# EAGLE board gator-bit-Panel (EAGLE 7.7.0), part 1 of 3
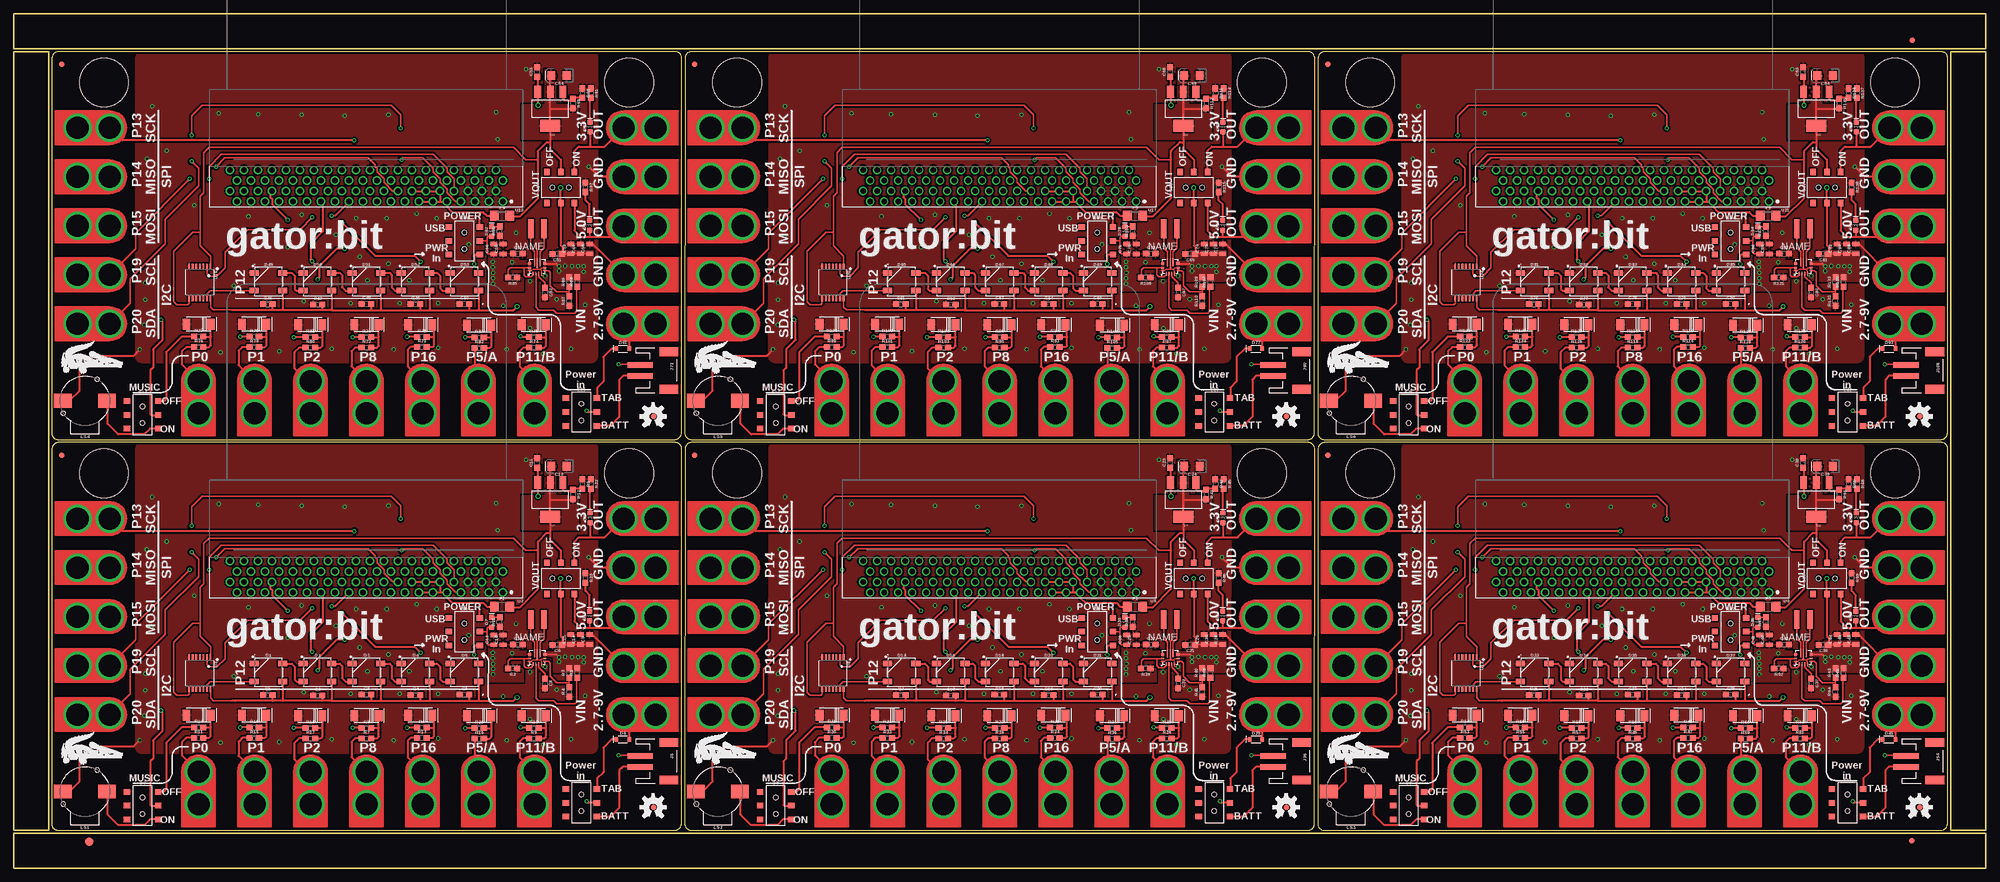
[diagram p0: board, top side]
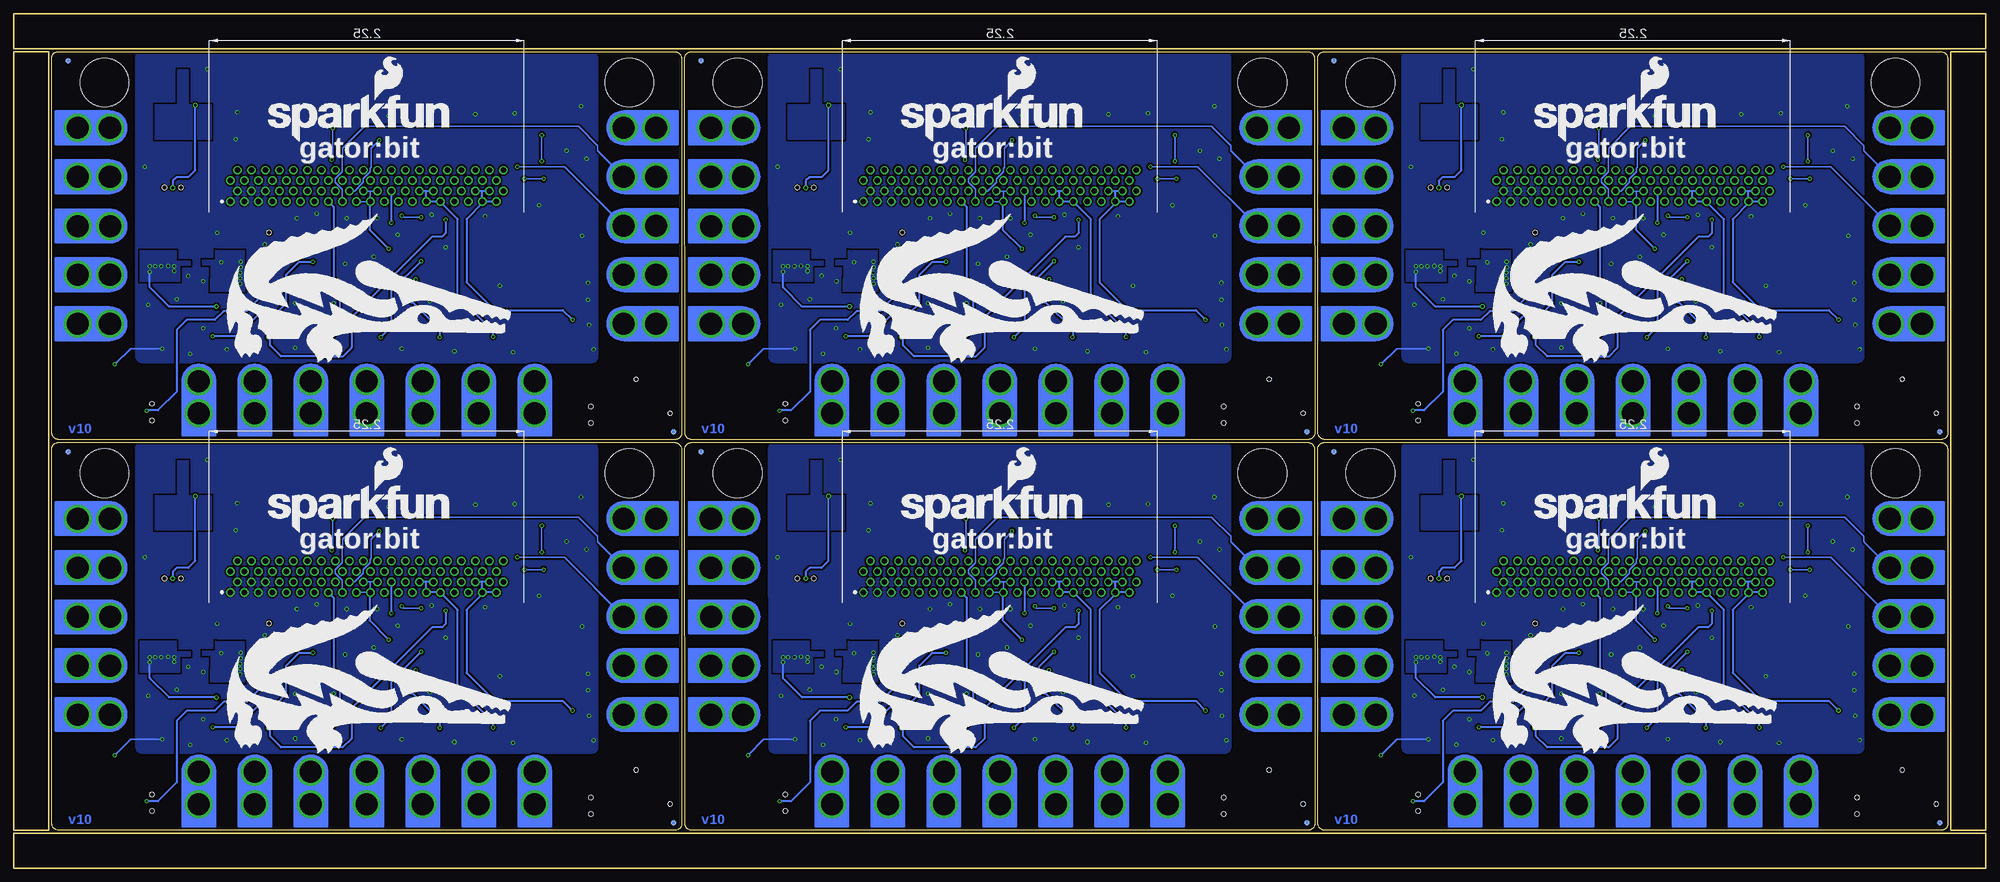
[diagram p1: board, bottom side, seen from below]

Size 357.82 x 155 mm. Coordinates in mm from the lower left corner, seen from the top.
Outline: 6.92,75.98 6.86,8.13 arc90 8.13,6.86 119.89,6.86 arc90 121.16,8.13 121.22,75.98 arc90 119.95,77.25 8.19,77.25 arc90 6.92,75.98
Outline: 121.79,75.98 121.73,8.13 arc90 123,6.86 234.76,6.86 arc90 236.03,8.13 236.09,75.98 arc90 234.82,77.25 123.06,77.25 arc90 121.79,75.98
Outline: 236.66,75.98 236.6,8.13 arc90 237.87,6.86 349.63,6.86 arc90 350.9,8.13 350.96,75.98 arc90 349.69,77.25 237.93,77.25 arc90 236.66,75.98
Outline: 6.92,146.88 6.86,79.03 arc90 8.13,77.76 119.89,77.76 arc90 121.16,79.03 121.22,146.88 arc90 119.95,148.15 8.19,148.15 arc90 6.92,146.88
Outline: 121.79,146.88 121.73,79.03 arc90 123,77.76 234.76,77.76 arc90 236.03,79.03 236.09,146.88 arc90 234.82,148.15 123.06,148.15 arc90 121.79,146.88
Outline: 236.66,146.88 236.6,79.03 arc90 237.87,77.76 349.63,77.76 arc90 350.9,79.03 350.96,146.88 arc90 349.69,148.15 237.93,148.15 arc90 236.66,146.88
Outline: 0,6.35 357.82,6.35 357.82,0 0,0 0,6.35
Outline: 351.47,148.15 357.82,148.15 357.82,6.86 351.47,6.86 351.47,148.15
Outline: 0,155 357.82,155 357.82,148.65 0,148.65 0,155
Outline: 0,148.15 6.35,148.15 6.35,6.86 0,6.86 0,148.15
Copper layers (1*16): Top 0.035mm / dielectric 1.5mm / Bottom 0.035mm
Design rules "SparkFun-2-layer-PCBWay-LIMIT": minimum track width 6mil, minimum drill 0.3mm, track to track 6mil, track to pad 6mil, pad to pad 6mil, via to via 6mil, smd to smd 6mil, copper to edge 6mil, drill to drill 6mil, minimum pad ring 7mil, minimum via ring 7mil, stop-mask expansion 4mil, vias tented up to drill 25mil, thermal gap 10mil
Holes 8.89 mm at 16.38,71.63 111.63,71.63 131.25,71.63 226.5,71.63 246.13,71.63 341.38,71.63 16.38,142.53 111.63,142.53 131.25,142.53 226.5,142.53 246.13,142.53 341.38,142.53

## Footprints (pad centres in the part's own frame; a part is rotated, then mirrored left to right if it is on the bottom)
0603 = smd 1.1 x 1: 1 -0.85,0; 2 0.85,0
0805 = smd 0.8 x 1.2: 1 -0.9,0; 2 0.9,0
EIA3216 = smd 1.4 x 1.6: + 1.4,0; - -1.4,0
WS2812B = smd 1.651 x 1: 1 2.577,-1.6; 2 2.577,1.6; 3 -2.577,1.6; 4 -2.577,-1.6
SOD-323 = smd 0.63 x 0.83: A 1.15,0; C -1.15,0
LED-0603 = smd 1 x 1: A -0.877,0; C 0.877,0
SOD-128 = smd 2 x 1.4: P$1 0,2.5; P$2 0,-1.9
FIDUCIAL-1X2 = smd 1 x 1: 1 0,0
FIDUCIAL-1.5X3 = smd 1.5 x 1.5: 1 0,0
1206 = smd 1.6 x 1.8: 1 -1.4,0; 2 1.4,0
GATOR = drill 4 pad 5.08: P$1 0,-6.096; P$2 0,-0.254
JST-2-SMD = smd 1 x 4.6: 1 -1,-3.7; 2 1,-3.7 | smd 1.6 x 3.4: NC1 -3.4,1.5; NC2 3.4,1.5
XFL4020 = smd 0.965 x 3.404: P$1 1.194,0; P$2 -1.194,0
BUZZER-CCV = smd 3.2 x 2.5: + 4,0; - -4,0 | hole 0.8: -3.9,-2.25; 2.25,3.9
SWITCH_DPDT_SMD_AYZ0202 = smd 1 x 1.15: 1 -2.5,2.825; 2 0,2.825; 3 2.5,2.825; 4 -2.5,-2.825; 5 0,-2.825; 6 2.5,-2.825 | hole 0.85: 1.5,0; -1.5,0
TPS63070RNM = smd 0.6 x 0.25: P$1 0,2.145; P$2 0,1.645; P$3 0,1.145; P$4 0,0.645 | smd 0.25 x 0.6: P$5 0.5,-0.005; P$6 1,-0.005; P$14 1,2.795; P$15 0.5,2.795 | smd 0.75 x 0.6: P$7 1.757,0.006; P$12 1.768,2.794 | smd 1.45 x 0.35: P$9 1.988,0.895; P$11 1.988,1.895 | smd 1.8 x 0.35: P$10 1.812,1.395
MICRO:BIT_RA_PTH = drill 1: A1 -24.765,7.62; A2 -23.495,5.72; A3 -22.225,7.62; A4 -20.955,5.72; A5 -19.685,7.62; A6 -18.415,5.72; A7 -17.145,7.62; A8 -15.875,5.72; A9 -14.605,7.62; A10 -13.335,5.72; A11 -12.065,7.62; A12 -10.795,5.72; A13 -9.525,7.62; A14 -8.255,5.72; A15 -6.985,7.62; A16 -5.715,5.72; A17 -4.445,7.62; A18 -3.175,5.72; A19 -1.905,7.62; A20 -0.635,5.72; A21 0.635,7.62; A22 1.905,5.72; A23 3.175,7.62; A24 4.445,5.72; A25 5.715,7.62; A26 6.985,5.72; A27 8.255,7.62; A28 9.525,5.72; A29 10.795,7.62; A30 12.065,5.72; A31 13.335,7.62; A32 14.605,5.72; A33 15.875,7.62; A34 17.145,5.72; A35 18.415,7.62; A36 19.685,5.72; A37 20.955,7.62; A38 22.225,5.72; A39 23.495,7.62; A40 24.765,5.72; B1 -24.765,3.82; B2 -23.495,1.92; B3 -22.225,3.82; B4 -20.955,1.92; B5 -19.685,3.82; B6 -18.415,1.92; B7 -17.145,3.82; B8 -15.875,1.92; B9 -14.605,3.82; B10 -13.335,1.92; B11 -12.065,3.82; B12 -10.795,1.92; B13 -9.525,3.82; B14 -8.255,1.92; B15 -6.985,3.82; B16 -5.715,1.92; B17 -4.445,3.82; B18 -3.175,1.92; B19 -1.905,3.82; B20 -0.635,1.92; B21 0.635,3.82; B22 1.905,1.92; B23 3.175,3.82; B24 4.445,1.92; B25 5.715,3.82; B26 6.985,1.92; B27 8.255,3.82; B28 9.525,1.92; B29 10.795,3.82; B30 12.065,1.92; B31 13.335,3.82; B32 14.605,1.92; B33 15.875,3.82; B34 17.145,1.92; B35 18.415,3.82; B36 19.685,1.92; B37 20.955,3.82; B38 22.225,1.92; B39 23.495,3.82; B40 24.765,1.92
TSSOP14 = smd 0.305 x 0.991: 1 -1.95,-2.918; 2 -1.3,-2.918; 3 -0.65,-2.918; 4 0,-2.918; 5 0.65,-2.918; 6 1.3,-2.918; 7 1.95,-2.918; 8 1.95,2.918; 9 1.3,2.918; 10 0.65,2.918; 11 0,2.918; 12 -0.65,2.918; 13 -1.3,2.918; 14 -1.95,2.918
SOT223 = smd 1.219 x 2.235: 1 -2.311,-3.099; 2 0,-3.099; 3 2.311,-3.099 | smd 3.6 x 2.2: 4 0,3.099

## Placement (x,y rotation side)
C1  0.1uF  [0603]  46.08,31.42 0 top
C2  0.1uF  [0603]  55.15,31.35 0 top
C3  0.1uF  [0603]  63.99,31.48 0 top
C4  0.1uF  [0603]  72.9,31.42 0 top
C5  0.1uF  [0603]  81.79,31.48 0 top
C6  10uF  [0603]  98.62,40.51 180 top
C7  0.1uF  [0603]  160.95,31.42 0 top
C8  0.1uF  [0603]  96.39,33.53 270 top
C9  22uF  [0805]  104.51,41.47 90 top
C10  10uF  [0805]  88.8,41.43 90 top
C11  0.1uF  [0603]  94.96,73.53 90 top
C12  10uF  [EIA3216]  98.93,72.9 180 top
C13  10uF  [0805]  87.09,41.43 90 top
C14  10uF  [0603]  91.47,40.58 0 top
C15  22uF  [0805]  101.1,41.47 90 top
C16  22uF  [0805]  102.82,41.47 90 top
C17  0.1uF  [0603]  170.02,31.35 0 top
C18  0.1uF  [0603]  178.86,31.48 0 top
C19  0.1uF  [0603]  187.77,31.42 0 top
C20  0.1uF  [0603]  196.66,31.48 0 top
C21  10uF  [0603]  213.49,40.51 180 top
C22  0.1uF  [0603]  211.26,33.53 270 top
C23  0.1uF  [0603]  209.84,73.53 90 top
C24  10uF  [EIA3216]  213.8,72.9 180 top
C25  10uF  [0805]  203.68,41.43 90 top
C26  10uF  [0805]  201.96,41.43 90 top
C27  10uF  [0603]  206.34,40.58 0 top
C28  22uF  [0805]  219.38,41.47 90 top
C29  22uF  [0805]  215.98,41.47 90 top
C30  22uF  [0805]  217.69,41.47 90 top
C31  0.1uF  [0603]  275.82,31.42 0 top
C32  0.1uF  [0603]  284.89,31.35 0 top
C33  0.1uF  [0603]  293.73,31.48 0 top
C34  0.1uF  [0603]  302.65,31.42 0 top
C35  0.1uF  [0603]  311.54,31.48 0 top
C36  10uF  [0603]  328.36,40.51 180 top
C37  0.1uF  [0603]  326.14,33.53 270 top
C38  0.1uF  [0603]  324.71,73.53 90 top
C39  10uF  [EIA3216]  328.68,72.9 180 top
C40  10uF  [0805]  318.55,41.43 90 top
C41  10uF  [0805]  316.83,41.43 90 top
C42  10uF  [0603]  321.21,40.58 0 top
C43  22uF  [0805]  334.25,41.47 90 top
C44  22uF  [0805]  330.85,41.47 90 top
C45  22uF  [0805]  332.56,41.47 90 top
C46  0.1uF  [0603]  46.08,102.31 0 top
C47  0.1uF  [0603]  55.15,102.25 0 top
C48  0.1uF  [0603]  63.99,102.38 0 top
C49  0.1uF  [0603]  72.9,102.32 0 top
C50  0.1uF  [0603]  81.79,102.38 0 top
C51  10uF  [0603]  98.62,111.41 180 top
C52  0.1uF  [0603]  96.39,104.43 270 top
C53  0.1uF  [0603]  94.96,144.43 90 top
C54  10uF  [EIA3216]  98.93,143.8 180 top
C55  10uF  [0805]  88.8,112.33 90 top
C56  10uF  [0805]  87.09,112.33 90 top
C57  10uF  [0603]  91.47,111.47 0 top
C58  22uF  [0805]  104.51,112.36 90 top
C59  22uF  [0805]  101.1,112.36 90 top
C60  22uF  [0805]  102.82,112.36 90 top
C61  0.1uF  [0603]  160.95,102.31 0 top
C62  0.1uF  [0603]  170.02,102.25 0 top
C63  0.1uF  [0603]  178.86,102.38 0 top
C64  0.1uF  [0603]  187.77,102.32 0 top
C65  0.1uF  [0603]  196.66,102.38 0 top
C66  10uF  [0603]  213.49,111.41 180 top
C67  0.1uF  [0603]  211.26,104.43 270 top
C68  0.1uF  [0603]  209.84,144.43 90 top
C69  10uF  [EIA3216]  213.8,143.8 180 top
C70  10uF  [0805]  203.68,112.33 90 top
C71  10uF  [0805]  201.96,112.33 90 top
C72  10uF  [0603]  206.34,111.47 0 top
C73  22uF  [0805]  219.38,112.36 90 top
C74  22uF  [0805]  215.98,112.36 90 top
C75  22uF  [0805]  217.69,112.36 90 top
C76  0.1uF  [0603]  275.82,102.31 0 top
C77  0.1uF  [0603]  284.89,102.25 0 top
C78  0.1uF  [0603]  293.73,102.38 0 top
C79  0.1uF  [0603]  302.65,102.32 0 top
C80  0.1uF  [0603]  311.54,102.38 0 top
C81  10uF  [0603]  328.36,111.41 180 top
C82  0.1uF  [0603]  326.14,104.43 270 top
C83  0.1uF  [0603]  324.71,144.43 90 top
C84  10uF  [EIA3216]  328.68,143.8 180 top
C85  10uF  [0805]  318.55,112.33 90 top
C86  10uF  [0805]  316.83,112.33 90 top
C87  10uF  [0603]  321.21,111.47 0 top
C88  22uF  [0805]  334.25,112.36 90 top
C89  22uF  [0805]  330.85,112.36 90 top
C90  22uF  [0805]  332.56,112.36 90 top
D1  WS2812B  [WS2812B]  46.23,35.49 0 top
D2  WS2812B  [WS2812B]  55.12,35.49 0 top
D3  WS2812B  [WS2812B]  64.01,35.49 0 top
D4  WS2812B  [WS2812B]  72.9,35.49 0 top
D5  WS2812B  [WS2812B]  81.79,35.49 0 top
D6  1A/23V/620mV  [SOD-323]  110.52,23.37 0 top
D7  RED  [LED-0603]  86.74,44.62 90 top
D8  3.8V  [SOD-128]  63.69,27.67 270 top
D9  RED  [LED-0603]  104.57,63.56 90 top
D10  3.8V  [SOD-128]  94.04,27.67 270 top
D11  RED  [LED-0603]  104.5,45.75 90 top
D12  3.8V  [SOD-128]  33.24,27.77 270 top
D13  3.8V  [SOD-128]  73.47,27.72 270 top
D14  WS2812B  [WS2812B]  161.1,35.49 0 top
D15  3.8V  [SOD-128]  43.32,27.75 270 top
D16  WS2812B  [WS2812B]  169.99,35.49 0 top
D17  3.8V  [SOD-128]  53.51,27.67 270 top
D18  WS2812B  [WS2812B]  178.88,35.49 0 top
D19  3.8V  [SOD-128]  84.14,27.62 270 top
D20  WS2812B  [WS2812B]  187.77,35.49 0 top
D21  WS2812B  [WS2812B]  196.66,35.49 0 top
D22  3.8V  [SOD-128]  188.34,27.72 270 top
D23  3.8V  [SOD-128]  178.56,27.67 270 top
D24  3.8V  [SOD-128]  208.91,27.67 270 top
D25  3.8V  [SOD-128]  148.11,27.77 270 top
D26  3.8V  [SOD-128]  158.19,27.75 270 top
D27  3.8V  [SOD-128]  168.38,27.67 270 top
D28  3.8V  [SOD-128]  199.01,27.62 270 top
D29  1A/23V/620mV  [SOD-323]  225.39,23.37 0 top
D30  RED  [LED-0603]  201.61,44.62 90 top
D31  RED  [LED-0603]  219.44,63.56 90 top
D32  RED  [LED-0603]  219.37,45.75 90 top
D33  WS2812B  [WS2812B]  275.98,35.49 0 top
D34  WS2812B  [WS2812B]  284.87,35.49 0 top
D35  WS2812B  [WS2812B]  293.76,35.49 0 top
D36  WS2812B  [WS2812B]  302.65,35.49 0 top
D37  WS2812B  [WS2812B]  311.54,35.49 0 top
D38  3.8V  [SOD-128]  303.21,27.72 270 top
D39  3.8V  [SOD-128]  293.43,27.67 270 top
D40  3.8V  [SOD-128]  323.79,27.67 270 top
D41  3.8V  [SOD-128]  262.98,27.77 270 top
D42  3.8V  [SOD-128]  273.06,27.75 270 top
D43  3.8V  [SOD-128]  283.25,27.67 270 top
D44  3.8V  [SOD-128]  313.88,27.62 270 top
D45  1A/23V/620mV  [SOD-323]  340.26,23.37 0 top
D46  RED  [LED-0603]  316.48,44.62 90 top
D47  RED  [LED-0603]  334.31,63.56 90 top
D48  RED  [LED-0603]  334.24,45.75 90 top
D49  WS2812B  [WS2812B]  46.23,106.39 0 top
D50  WS2812B  [WS2812B]  55.12,106.39 0 top
D51  WS2812B  [WS2812B]  64.01,106.39 0 top
D52  WS2812B  [WS2812B]  72.9,106.39 0 top
D53  WS2812B  [WS2812B]  81.79,106.39 0 top
D54  3.8V  [SOD-128]  73.47,98.62 270 top
D55  3.8V  [SOD-128]  63.69,98.57 270 top
D56  3.8V  [SOD-128]  94.04,98.57 270 top
D57  3.8V  [SOD-128]  33.24,98.67 270 top
D58  3.8V  [SOD-128]  43.32,98.65 270 top
D59  3.8V  [SOD-128]  53.51,98.57 270 top
D60  3.8V  [SOD-128]  84.14,98.52 270 top
D61  1A/23V/620mV  [SOD-323]  110.52,94.27 0 top
D62  RED  [LED-0603]  86.74,115.52 90 top
D63  RED  [LED-0603]  104.57,134.46 90 top
D64  RED  [LED-0603]  104.5,116.64 90 top
D65  WS2812B  [WS2812B]  161.1,106.39 0 top
D66  WS2812B  [WS2812B]  169.99,106.39 0 top
D67  WS2812B  [WS2812B]  178.88,106.39 0 top
D68  WS2812B  [WS2812B]  187.77,106.39 0 top
D69  WS2812B  [WS2812B]  196.66,106.39 0 top
D70  3.8V  [SOD-128]  188.34,98.62 270 top
D71  3.8V  [SOD-128]  178.56,98.57 270 top
D72  3.8V  [SOD-128]  208.91,98.57 270 top
D73  3.8V  [SOD-128]  148.11,98.67 270 top
D74  3.8V  [SOD-128]  158.19,98.65 270 top
D75  3.8V  [SOD-128]  168.38,98.57 270 top
D76  3.8V  [SOD-128]  199.01,98.52 270 top
D77  1A/23V/620mV  [SOD-323]  225.39,94.27 0 top
D78  RED  [LED-0603]  201.61,115.52 90 top
D79  RED  [LED-0603]  219.44,134.46 90 top
D80  RED  [LED-0603]  219.37,116.64 90 top
D81  WS2812B  [WS2812B]  275.98,106.39 0 top
D82  WS2812B  [WS2812B]  284.87,106.39 0 top
D83  WS2812B  [WS2812B]  293.76,106.39 0 top
D84  WS2812B  [WS2812B]  302.65,106.39 0 top
D85  WS2812B  [WS2812B]  311.54,106.39 0 top
D86  3.8V  [SOD-128]  303.21,98.62 270 top
D87  3.8V  [SOD-128]  293.43,98.57 270 top
D88  3.8V  [SOD-128]  323.79,98.57 270 top
D89  3.8V  [SOD-128]  262.98,98.67 270 top
D90  3.8V  [SOD-128]  273.06,98.65 270 top
D91  3.8V  [SOD-128]  283.25,98.57 270 top
D92  3.8V  [SOD-128]  313.88,98.52 270 top
D93  1A/23V/620mV  [SOD-323]  340.26,94.27 0 top
D94  RED  [LED-0603]  316.48,115.52 90 top
D95  RED  [LED-0603]  334.31,134.46 90 top
D96  RED  [LED-0603]  334.24,116.64 90 top
E$1  [FIDUCIAL-1X2]  344.42,4.95 0 top
E$2  [FIDUCIAL-1X2]  344.49,150.24 180 top
E$3  [FIDUCIAL-1.5X3]  13.72,4.76 0 top
F1  6V/0.5A  [1206]  88.6,47.45 0 top
F2  6V/0.5A  [1206]  203.47,47.45 0 top
F3  6V/0.5A  [1206]  318.34,47.45 0 top
F4  6V/0.5A  [1206]  88.6,118.34 0 top
F5  6V/0.5A  [1206]  203.47,118.34 0 top
F6  6V/0.5A  [1206]  318.34,118.34 0 top
FD1  FIDUCIAL1X2  [FIDUCIAL-1X2]  8.32,8.28 0 bottom
FD2  FIDUCIAL1X2  [FIDUCIAL-1X2]  8.67,74.93 0 top
FD3  FIDUCIAL1X2  [FIDUCIAL-1X2]  116.08,11.06 0 top
FD4  FIDUCIAL1X2  [FIDUCIAL-1X2]  118.24,75.56 0 bottom
FD5  FIDUCIAL1X2  [FIDUCIAL-1X2]  123.19,8.28 0 bottom
FD6  FIDUCIAL1X2  [FIDUCIAL-1X2]  123.54,74.93 0 top
FD7  FIDUCIAL1X2  [FIDUCIAL-1X2]  233.11,75.56 0 bottom
FD8  FIDUCIAL1X2  [FIDUCIAL-1X2]  230.95,11.06 0 top
FD9  FIDUCIAL1X2  [FIDUCIAL-1X2]  238.07,8.28 0 bottom
FD10  FIDUCIAL1X2  [FIDUCIAL-1X2]  238.42,74.93 0 top
FD11  FIDUCIAL1X2  [FIDUCIAL-1X2]  347.98,75.56 0 bottom
FD12  FIDUCIAL1X2  [FIDUCIAL-1X2]  345.82,11.06 0 top
FD13  FIDUCIAL1X2  [FIDUCIAL-1X2]  8.32,79.18 0 bottom
FD14  FIDUCIAL1X2  [FIDUCIAL-1X2]  8.67,145.82 0 top
FD15  FIDUCIAL1X2  [FIDUCIAL-1X2]  118.24,146.46 0 bottom
FD16  FIDUCIAL1X2  [FIDUCIAL-1X2]  116.08,81.96 0 top
FD17  FIDUCIAL1X2  [FIDUCIAL-1X2]  123.19,79.18 0 bottom
FD18  FIDUCIAL1X2  [FIDUCIAL-1X2]  123.54,145.82 0 top
FD19  FIDUCIAL1X2  [FIDUCIAL-1X2]  233.11,146.46 0 bottom
FD20  FIDUCIAL1X2  [FIDUCIAL-1X2]  230.95,81.96 0 top
FD21  FIDUCIAL1X2  [FIDUCIAL-1X2]  238.07,79.18 0 bottom
FD22  FIDUCIAL1X2  [FIDUCIAL-1X2]  238.42,145.82 0 top
FD23  FIDUCIAL1X2  [FIDUCIAL-1X2]  347.98,146.46 0 bottom
FD24  FIDUCIAL1X2  [FIDUCIAL-1X2]  345.82,81.96 0 top
J1  GATOR  [GATOR]  110.36,45.59 90 top
J2  GATOR  [GATOR]  110.37,54.54 90 top
J3  GATOR  [GATOR]  110.37,27.87 90 top
J4  GATOR  [GATOR]  110.37,36.76 90 top
J5  [JST-2-SMD]  117.35,19.4 270 top
J6  GATOR  [GATOR]  110.37,63.43 90 top
J7  GATOR  [GATOR]  33.53,17.71 0 top
J8  GATOR  [GATOR]  43.69,17.71 0 top
J9  GATOR  [GATOR]  53.85,17.71 0 top
J10  GATOR  [GATOR]  84.33,17.71 0 top
J11  GATOR  [GATOR]  64.01,17.71 0 top
J12  GATOR  [GATOR]  17.66,63.43 270 top
J13  GATOR  [GATOR]  17.66,54.54 270 top
J14  GATOR  [GATOR]  17.66,45.65 270 top
J15  GATOR  [GATOR]  74.17,17.71 0 top
J16  GATOR  [GATOR]  17.66,36.76 270 top
J17  GATOR  [GATOR]  17.66,27.87 270 top
J18  GATOR  [GATOR]  94.49,17.71 0 top
J19  GATOR  [GATOR]  225.24,63.43 90 top
J20  GATOR  [GATOR]  148.4,17.71 0 top
J21  GATOR  [GATOR]  158.56,17.71 0 top
J22  GATOR  [GATOR]  168.72,17.71 0 top
J23  GATOR  [GATOR]  199.2,17.71 0 top
J24  GATOR  [GATOR]  178.88,17.71 0 top
J25  GATOR  [GATOR]  132.53,63.43 270 top
J26  GATOR  [GATOR]  132.53,54.54 270 top
J27  GATOR  [GATOR]  132.53,45.65 270 top
J28  GATOR  [GATOR]  189.04,17.71 0 top
J29  GATOR  [GATOR]  132.53,36.76 270 top
J30  GATOR  [GATOR]  132.53,27.87 270 top
J31  GATOR  [GATOR]  209.36,17.71 0 top
J32  GATOR  [GATOR]  225.24,54.54 90 top
J33  GATOR  [GATOR]  225.24,27.87 90 top
J34  GATOR  [GATOR]  225.24,36.76 90 top
J35  GATOR  [GATOR]  225.23,45.59 90 top
J36  [JST-2-SMD]  232.22,19.4 270 top
J37  GATOR  [GATOR]  340.11,63.43 90 top
J38  GATOR  [GATOR]  263.28,17.71 0 top
J39  GATOR  [GATOR]  273.44,17.71 0 top
J40  GATOR  [GATOR]  283.6,17.71 0 top
J41  GATOR  [GATOR]  314.08,17.71 0 top
J42  GATOR  [GATOR]  293.76,17.71 0 top
J43  GATOR  [GATOR]  247.4,63.43 270 top
J44  GATOR  [GATOR]  247.4,54.54 270 top
J45  GATOR  [GATOR]  247.4,45.65 270 top
J46  GATOR  [GATOR]  303.92,17.71 0 top
J47  GATOR  [GATOR]  247.4,36.76 270 top
J48  GATOR  [GATOR]  247.4,27.87 270 top
J49  GATOR  [GATOR]  324.24,17.71 0 top
J50  GATOR  [GATOR]  340.11,54.54 90 top
J51  GATOR  [GATOR]  340.11,27.87 90 top
J52  GATOR  [GATOR]  340.11,36.76 90 top
J53  GATOR  [GATOR]  340.11,45.59 90 top
J54  [JST-2-SMD]  347.09,19.4 270 top
J55  GATOR  [GATOR]  110.37,134.33 90 top
J56  GATOR  [GATOR]  33.53,88.61 0 top
J57  GATOR  [GATOR]  43.69,88.61 0 top
J58  GATOR  [GATOR]  53.85,88.61 0 top
J59  GATOR  [GATOR]  84.33,88.61 0 top
J60  GATOR  [GATOR]  64.01,88.61 0 top
J61  GATOR  [GATOR]  17.66,134.33 270 top
J62  GATOR  [GATOR]  17.66,125.44 270 top
J63  GATOR  [GATOR]  17.66,116.55 270 top
J64  GATOR  [GATOR]  74.17,88.61 0 top
J65  GATOR  [GATOR]  17.66,107.66 270 top
J66  GATOR  [GATOR]  17.66,98.77 270 top
J67  GATOR  [GATOR]  94.49,88.61 0 top
J68  GATOR  [GATOR]  110.37,125.44 90 top
J69  GATOR  [GATOR]  110.37,98.77 90 top
J70  GATOR  [GATOR]  110.37,107.66 90 top
J71  GATOR  [GATOR]  110.36,116.49 90 top
J72  [JST-2-SMD]  117.35,90.3 270 top
J73  GATOR  [GATOR]  225.24,134.33 90 top
J74  GATOR  [GATOR]  148.4,88.61 0 top
J75  GATOR  [GATOR]  158.56,88.61 0 top
J76  GATOR  [GATOR]  168.72,88.61 0 top
J77  GATOR  [GATOR]  199.2,88.61 0 top
J78  GATOR  [GATOR]  178.88,88.61 0 top
J79  GATOR  [GATOR]  132.53,134.33 270 top
J80  GATOR  [GATOR]  132.53,125.44 270 top
J81  GATOR  [GATOR]  132.53,116.55 270 top
J82  GATOR  [GATOR]  189.04,88.61 0 top
J83  GATOR  [GATOR]  132.53,107.66 270 top
J84  GATOR  [GATOR]  132.53,98.77 270 top
J85  GATOR  [GATOR]  209.36,88.61 0 top
J86  GATOR  [GATOR]  225.24,125.44 90 top
J87  GATOR  [GATOR]  225.24,98.77 90 top
J88  GATOR  [GATOR]  225.24,107.66 90 top
J89  GATOR  [GATOR]  225.23,116.49 90 top
J90  [JST-2-SMD]  232.22,90.3 270 top
J91  GATOR  [GATOR]  340.11,134.33 90 top
J92  GATOR  [GATOR]  263.28,88.61 0 top
J93  GATOR  [GATOR]  273.44,88.61 0 top
J94  GATOR  [GATOR]  283.6,88.61 0 top
J95  GATOR  [GATOR]  314.08,88.61 0 top
J96  GATOR  [GATOR]  293.76,88.61 0 top
J97  GATOR  [GATOR]  247.4,134.33 270 top
J98  GATOR  [GATOR]  247.4,125.44 270 top
J99  GATOR  [GATOR]  247.4,116.55 270 top
J100  GATOR  [GATOR]  303.92,88.61 0 top
J101  GATOR  [GATOR]  247.4,107.66 270 top
J102  GATOR  [GATOR]  247.4,98.77 270 top
J103  GATOR  [GATOR]  324.24,88.61 0 top
J104  GATOR  [GATOR]  340.11,125.44 90 top
J105  GATOR  [GATOR]  340.11,98.77 90 top
J106  GATOR  [GATOR]  340.11,107.66 90 top
J107  GATOR  [GATOR]  340.11,116.49 90 top
J108  [JST-2-SMD]  347.09,90.3 270 top
L1  1.5UH  [XFL4020]  95,45.12 180 top
L2  1.5UH  [XFL4020]  209.87,45.12 180 top
L3  1.5UH  [XFL4020]  324.74,45.12 180 top
L4  1.5UH  [XFL4020]  95,116.01 180 top
L5  1.5UH  [XFL4020]  209.87,116.01 180 top
L6  1.5UH  [XFL4020]  324.74,116.01 180 top
LOGO1  SFE_LOGO_NAME_FLAME.3_INCH  [SFE_LOGO_NAME_FLAME_.3]  82.42,60.83 0 bottom
LOGO2  OSHW-LOGOM  [OSHW-LOGO-M]  116.01,11.05 0 top
LOGO3  SFE_LOGO_NAME_FLAME.3_INCH  [SFE_LOGO_NAME_FLAME_.3]  197.29,60.83 0 bottom
LOGO4  OSHW-LOGOM  [OSHW-LOGO-M]  230.89,11.05 0 top
LOGO5  SFE_LOGO_NAME_FLAME.3_INCH  [SFE_LOGO_NAME_FLAME_.3]  312.17,60.83 0 bottom
LOGO6  OSHW-LOGOM  [OSHW-LOGO-M]  345.76,11.05 0 top
LOGO7  SFE_LOGO_NAME_FLAME.3_INCH  [SFE_LOGO_NAME_FLAME_.3]  82.42,131.73 0 bottom
LOGO8  OSHW-LOGOM  [OSHW-LOGO-M]  116.01,81.95 0 top
LOGO9  SFE_LOGO_NAME_FLAME.3_INCH  [SFE_LOGO_NAME_FLAME_.3]  197.29,131.73 0 bottom
LOGO10  OSHW-LOGOM  [OSHW-LOGO-M]  230.89,81.95 0 top
LOGO11  SFE_LOGO_NAME_FLAME.3_INCH  [SFE_LOGO_NAME_FLAME_.3]  312.17,131.73 0 bottom
LOGO12  OSHW-LOGOM  [OSHW-LOGO-M]  345.76,81.95 0 top
LS1  BUZZER-SMD  [BUZZER-CCV]  12.9,13.9 0 top
LS2  BUZZER-SMD  [BUZZER-CCV]  127.77,13.9 0 top
LS3  BUZZER-SMD  [BUZZER-CCV]  242.64,13.9 0 top
LS4  BUZZER-SMD  [BUZZER-CCV]  12.9,84.8 0 top
LS5  BUZZER-SMD  [BUZZER-CCV]  127.77,84.8 0 top
LS6  BUZZER-SMD  [BUZZER-CCV]  242.64,84.8 0 top
R1  100k  [0603]  102.27,35.43 90 top
R2  10.2K  [0603]  90.52,36.23 180 top
R3  523k  [0603]  100.8,35.43 90 top
R4  100k  [0603]  100.8,31.99 90 top
R5  390k  [0603]  103.17,69.7 270 top
R6  910  [0603]  74.04,25.5 0 top
R7  604  [0603]  64.01,23.55 0 top
R8  910  [0603]  64.01,25.45 0 top
R9  604  [0603]  94.36,23.55 0 top
R10  910  [0603]  94.36,25.45 0 top
R11  604  [0603]  33.55,23.65 0 top
R12  240  [0603]  101.47,67.82 270 top
R13  604  [0603]  74.05,23.66 0 top
R14  910  [0603]  33.55,25.55 0 top
R15  604  [0603]  43.64,23.62 0 top
R16  910  [0603]  43.64,25.53 0 top
R17  604  [0603]  53.82,23.55 0 top
R18  910  [0603]  53.82,25.45 0 top
R19  604  [0603]  84.45,23.5 0 top
R20  910  [0603]  84.45,25.4 0 top
R21  1k  [0603]  88.18,44.67 90 top
R22  1k  [0603]  104.7,69.7 270 top
R23  1k  [0603]  103.73,52.63 270 top
R24  604  [0603]  188.92,23.66 0 top
R25  910  [0603]  188.91,25.5 0 top
R26  604  [0603]  178.88,23.55 0 top
R27  910  [0603]  178.88,25.45 0 top
R28  604  [0603]  209.23,23.55 0 top
R29  910  [0603]  209.23,25.45 0 top
R30  604  [0603]  148.42,23.65 0 top
R31  910  [0603]  148.42,25.55 0 top
R32  604  [0603]  158.51,23.62 0 top
R33  910  [0603]  158.51,25.53 0 top
R34  604  [0603]  168.69,23.55 0 top
R35  910  [0603]  168.69,25.45 0 top
R36  604  [0603]  199.33,23.5 0 top
R37  910  [0603]  199.33,25.4 0 top
R38  100k  [0603]  217.14,35.43 90 top
R39  10.2K  [0603]  205.39,36.23 180 top
R40  523k  [0603]  215.67,35.43 90 top
R41  100k  [0603]  215.67,31.99 90 top
R42  390k  [0603]  218.05,69.7 270 top
R43  240  [0603]  216.34,67.82 270 top
R44  1k  [0603]  203.05,44.67 90 top
R45  1k  [0603]  219.57,69.7 270 top
R46  1k  [0603]  218.61,52.63 270 top
R47  604  [0603]  303.79,23.66 0 top
R48  910  [0603]  303.78,25.5 0 top
R49  604  [0603]  293.75,23.55 0 top
R50  910  [0603]  293.75,25.45 0 top
R51  604  [0603]  324.1,23.55 0 top
R52  910  [0603]  324.1,25.45 0 top
R53  604  [0603]  263.3,23.65 0 top
R54  910  [0603]  263.3,25.55 0 top
R55  604  [0603]  273.38,23.62 0 top
R56  910  [0603]  273.38,25.53 0 top
R57  604  [0603]  283.57,23.55 0 top
R58  910  [0603]  283.57,25.45 0 top
R59  604  [0603]  314.2,23.5 0 top
R60  910  [0603]  314.2,25.4 0 top
R61  100k  [0603]  332.02,35.43 90 top
R62  10.2K  [0603]  320.26,36.23 180 top
R63  523k  [0603]  330.54,35.43 90 top
R64  100k  [0603]  330.54,31.99 90 top
R65  390k  [0603]  332.92,69.7 270 top
R66  240  [0603]  331.22,67.82 270 top
R67  1k  [0603]  317.93,44.67 90 top
R68  1k  [0603]  334.44,69.7 270 top
R69  1k  [0603]  333.48,52.63 270 top
R70  604  [0603]  74.05,94.55 0 top
R71  910  [0603]  74.04,96.4 0 top
R72  604  [0603]  64.01,94.44 0 top
R73  910  [0603]  64.01,96.35 0 top
R74  604  [0603]  94.36,94.44 0 top
R75  910  [0603]  94.36,96.35 0 top
R76  604  [0603]  33.55,94.55 0 top
R77  910  [0603]  33.55,96.45 0 top
R78  604  [0603]  43.64,94.52 0 top
R79  910  [0603]  43.64,96.42 0 top
R80  604  [0603]  53.82,94.44 0 top
R81  910  [0603]  53.82,96.35 0 top
R82  604  [0603]  84.45,94.39 0 top
R83  910  [0603]  84.45,96.3 0 top
R84  100k  [0603]  102.27,106.33 90 top
R85  10.2K  [0603]  90.52,107.12 180 top
R86  523k  [0603]  100.8,106.33 90 top
R87  100k  [0603]  100.8,102.89 90 top
R88  390k  [0603]  103.17,140.6 270 top
R89  240  [0603]  101.47,138.72 270 top
R90  1k  [0603]  88.18,115.56 90 top
R91  1k  [0603]  104.7,140.6 270 top
R92  1k  [0603]  103.73,123.53 270 top
R93  604  [0603]  188.92,94.55 0 top
R94  910  [0603]  188.91,96.4 0 top
R95  604  [0603]  178.88,94.44 0 top
R96  910  [0603]  178.88,96.35 0 top
R97  604  [0603]  209.23,94.44 0 top
R98  910  [0603]  209.23,96.35 0 top
R99  604  [0603]  148.42,94.55 0 top
R100  910  [0603]  148.42,96.45 0 top
R101  604  [0603]  158.51,94.52 0 top
R102  910  [0603]  158.51,96.42 0 top
R103  604  [0603]  168.69,94.44 0 top
R104  910  [0603]  168.69,96.35 0 top
R105  604  [0603]  199.33,94.39 0 top
R106  910  [0603]  199.33,96.3 0 top
R107  100k  [0603]  217.14,106.33 90 top
R108  10.2K  [0603]  205.39,107.12 180 top
R109  523k  [0603]  215.67,106.33 90 top
R110  100k  [0603]  215.67,102.89 90 top
R111  390k  [0603]  218.05,140.6 270 top
R112  240  [0603]  216.34,138.72 270 top
R113  1k  [0603]  203.05,115.56 90 top
R114  1k  [0603]  219.57,140.6 270 top
R115  1k  [0603]  218.61,123.53 270 top
R116  604  [0603]  303.79,94.55 0 top
R117  910  [0603]  303.78,96.4 0 top
R118  604  [0603]  293.75,94.44 0 top
R119  910  [0603]  293.75,96.35 0 top
R120  604  [0603]  324.1,94.44 0 top
R121  910  [0603]  324.1,96.35 0 top
R122  604  [0603]  263.3,94.55 0 top
R123  910  [0603]  263.3,96.45 0 top
R124  604  [0603]  273.38,94.52 0 top
R125  910  [0603]  273.38,96.42 0 top
R126  604  [0603]  283.57,94.44 0 top
R127  910  [0603]  283.57,96.35 0 top
R128  604  [0603]  314.2,94.39 0 top
R129  910  [0603]  314.2,96.3 0 top
R130  100k  [0603]  332.02,106.33 90 top
R131  10.2K  [0603]  320.26,107.12 180 top
R132  523k  [0603]  330.54,106.33 90 top
R133  100k  [0603]  330.54,102.89 90 top
R134  390k  [0603]  332.92,140.6 270 top
R135  240  [0603]  331.22,138.72 270 top
R136  1k  [0603]  317.93,115.56 90 top
R137  1k  [0603]  334.44,140.6 270 top
R138  1k  [0603]  333.48,123.53 270 top
S1  [SWITCH_DPDT_SMD_AYZ0202]  99.25,52.58 0 top
S2  [SWITCH_DPDT_SMD_AYZ0202]  102.98,11.86 270 top
S3  [SWITCH_DPDT_SMD_AYZ0202]  23.37,11.36 270 top
S4  [SWITCH_DPDT_SMD_AYZ0202]  81.75,42.9 270 top
S5  [SWITCH_DPDT_SMD_AYZ0202]  138.24,11.36 270 top
S6  [SWITCH_DPDT_SMD_AYZ0202]  214.12,52.58 0 top
S7  [SWITCH_DPDT_SMD_AYZ0202]  217.86,11.86 270 top
S8  [SWITCH_DPDT_SMD_AYZ0202]  196.62,42.9 270 top
S9  [SWITCH_DPDT_SMD_AYZ0202]  253.12,11.36 270 top
S10  [SWITCH_DPDT_SMD_AYZ0202]  328.99,52.58 0 top
S11  [SWITCH_DPDT_SMD_AYZ0202]  332.73,11.86 270 top
S12  [SWITCH_DPDT_SMD_AYZ0202]  311.49,42.9 270 top
S13  [SWITCH_DPDT_SMD_AYZ0202]  23.37,82.26 270 top
S14  [SWITCH_DPDT_SMD_AYZ0202]  99.25,123.48 0 top
S15  [SWITCH_DPDT_SMD_AYZ0202]  102.98,82.76 270 top
S16  [SWITCH_DPDT_SMD_AYZ0202]  81.75,113.8 270 top
S17  [SWITCH_DPDT_SMD_AYZ0202]  138.24,82.26 270 top
S18  [SWITCH_DPDT_SMD_AYZ0202]  214.12,123.48 0 top
S19  [SWITCH_DPDT_SMD_AYZ0202]  217.86,82.76 270 top
S20  [SWITCH_DPDT_SMD_AYZ0202]  196.62,113.8 270 top
S21  [SWITCH_DPDT_SMD_AYZ0202]  253.12,82.26 270 top
S22  [SWITCH_DPDT_SMD_AYZ0202]  328.99,123.48 0 top
S23  [SWITCH_DPDT_SMD_AYZ0202]  332.73,82.76 270 top
S24  [SWITCH_DPDT_SMD_AYZ0202]  311.49,113.8 270 top
U1  TPS63070  [TPS63070RNM]  96.39,37.02 90 top
U2  micro:bit  [MICRO:BIT_RA_PTH]  64.01,57.66 180 top
U3  TXB0104  [TSSOP14]  33.76,35.38 180 top
U4  ADJ REG 1.5A  [SOT223]  97.35,66.87 180 top
U5  micro:bit  [MICRO:BIT_RA_PTH]  178.88,57.66 180 top
U6  TPS63070  [TPS63070RNM]  211.26,37.02 90 top
U7  ADJ REG 1.5A  [SOT223]  212.22,66.87 180 top
U8  TXB0104  [TSSOP14]  148.63,35.38 180 top
U9  micro:bit  [MICRO:BIT_RA_PTH]  293.75,57.66 180 top
U10  TPS63070  [TPS63070RNM]  326.14,37.02 90 top
U11  ADJ REG 1.5A  [SOT223]  327.09,66.87 180 top
U12  TXB0104  [TSSOP14]  263.5,35.38 180 top
U13  micro:bit  [MICRO:BIT_RA_PTH]  64.01,128.56 180 top
U14  TPS63070  [TPS63070RNM]  96.39,107.92 90 top
U15  ADJ REG 1.5A  [SOT223]  97.35,137.76 180 top
U16  TXB0104  [TSSOP14]  33.76,106.28 180 top
U17  micro:bit  [MICRO:BIT_RA_PTH]  178.88,128.56 180 top
U18  TPS63070  [TPS63070RNM]  211.26,107.92 90 top
U19  ADJ REG 1.5A  [SOT223]  212.22,137.76 180 top
U20  TXB0104  [TSSOP14]  148.63,106.28 180 top
U21  micro:bit  [MICRO:BIT_RA_PTH]  293.75,128.56 180 top
U22  TPS63070  [TPS63070RNM]  326.14,107.92 90 top
U23  ADJ REG 1.5A  [SOT223]  327.09,137.76 180 top
U24  TXB0104  [TSSOP14]  263.5,106.28 180 top

## Library data of the parts
C1-C5 C7 C8 C11 C17-C20 C22 C23 C31-C35 C37 C38 C46-C50 C52 C53 C61-C65 C67 C68 C76-C80 C82 C83 = SparkFun-Capacitors; PROD_ID: CAP-00810
C6 C14 C21 C27 C36 C42 C51 C57 C66 C72 C81 C87 = SparkFun-Capacitors; PROD_ID: CAP-11015
C9 C15 C16 C28-C30 C43-C45 C58-C60 C73-C75 C88-C90 = SparkFun-Capacitors; PROD_ID: CAP-08402
C10 C13 C25 C26 C40 C41 C55 C56 C70 C71 C85 C86 = SparkFun-Capacitors; PROD_ID: CAP-11330
C12 C24 C39 C54 C69 C84 = SparkFun-Capacitors; PROD_ID: CAP-00811
D1-D5 D14 D16 D18 D20 D21 D33-D37 D49-D53 D65-D69 D81-D85 = SparkFun-LED; PROD_ID: DIO-12503
D6 D29 D45 D61 D77 D93 = SparkFun-DiscreteSemi; PROD_ID: DIO-11623
D7 D9 D11 D30-D32 D46-D48 D62-D64 D78-D80 D94-D96 = SparkFun-LED; PROD_ID: DIO-00819
D8 D10 D12 D13 D15 D17 D19 D22-D28 D38-D44 D54-D60 D70-D76 D86-D92 = PDZVTR36BCT; PROD_ID: DIO-13895; TECHNOLOGIES: Zener Diode 3.8V 1W ±5.26% Surface Mount PMDTM
E$1 E$2 FD1-FD24 LOGO1-LOGO12 = SparkFun-Aesthetics
E$3 = SparkFun-Retired
F1-F6 = SparkFun-Fuses; PROD_ID: RES-08585
J1-J4 J6-J35 J37-J53 J55-J71 J73-J89 J91-J107 = TAB
J5 J36 J54 J72 J90 J108 = SparkFun-Connectors; PROD_ID: CONN-11443
L1-L6 = SparkFun-Coils; PROD_ID: NDUC-13855
LS1-LS6 = SparkFun-Electromechanical; PROD_ID: COMP-08568
R1 R4 R38 R41 R61 R64 R84 R87 R107 R110 R130 R133 = SparkFun-Resistors; PROD_ID: RES-07828
R2 R39 R62 R85 R108 R131 = SparkFun-Resistors; PROD_ID: RES-13856
R3 R40 R63 R86 R109 R132 = SparkFun-Resistors; PROD_ID: RES-13864
R5 R42 R65 R88 R111 R134 = SparkFun-Resistors; PROD_ID: RES-12024
R6 R8 R10 R14 R16 R18 R20 R25 R27 R29 R31 R33 R35 R37 R48 R50 R52 R54 R56 R58 R60 R71 R73 R75 R77 R79 R81 R83 R94 R96 R98 R100 R102 R104 R106 R117 R119 R121 R123 R125 R127 R129 = SparkFun-Resistors; PROD_ID: RES-13860
R7 R9 R11 R13 R15 R17 R19 R24 R26 R28 R30 R32 R34 R36 R47 R49 R51 R53 R55 R57 R59 R70 R72 R74 R76 R78 R80 R82 R93 R95 R97 R99 R101 R103 R105 R116 R118 R120 R122 R124 R126 R128 = SparkFun-Resistors; PROD_ID: RES-13857
R12 R43 R66 R89 R112 R135 = SparkFun-Resistors; PROD_ID: RES-07849
R21-R23 R44-R46 R67-R69 R90-R92 R113-R115 R136-R138 = SparkFun-Resistors; PROD_ID: RES-07856
S1 S6 S10 S14 S18 S22 = SparkFun-Switches; PROD_ID: SWCH-08179; SF_SKU: COM-00597
S2-S5 S7-S9 S11-S13 S15-S17 S19-S21 S23 S24 = SparkFun-Switches; PROD_ID: SWCH-08179; SF_ID: COM-00597
U1 U6 U10 U14 U18 U22 = SparkFun-IC-Power; PROD_ID: IC-13858
U2 U5 U9 U13 U17 U21 = Micro_Bit_Parts; PROD_ID: CONN-13452
U3 U8 U12 U16 U20 U24 = SparkFun-IC-Comms; PROD_ID: IC-13929
U4 U7 U11 U15 U19 U23 = SparkFun-IC-Power; PROD_ID: VREG-12029

## Nets
3.3V: C12.+ F1.2 R12.2 S1.2 U3.1 U3.8 U4.2 U4.4
3.3V1: C24.+ F2.2 R43.2 S6.2 U7.2 U7.4 U8.1 U8.8
3.3V2: C39.+ F3.2 R66.2 S10.2 U11.2 U11.4 U12.1 U12.8
3.3V3: C54.+ F4.2 R89.2 S14.2 U15.2 U15.4 U16.1 U16.8
3.3V4: C69.+ F5.2 R112.2 S18.2 U19.2 U19.4 U20.1 U20.8
3.3V5: C84.+ F6.2 R135.2 S22.2 U23.2 U23.4 U24.1 U24.8
5V: C1.2 C2.2 C3.2 C4.2 C5.2 C6.1 C9.1 C11.1 C15.1 C16.1 D1.1 D2.1 D3.1 D4.1 D5.1 R1.2 R3.2 S1.5 U1.P$7 U3.14 U4.3
5V1: C7.2 C17.2 C18.2 C19.2 C20.2 C21.1 C23.1 C28.1 C29.1 C30.1 D14.1 D16.1 D18.1 D20.1 D21.1 R38.2 R40.2 S6.5 U6.P$7 U7.3 U8.14
5V2: C31.2 C32.2 C33.2 C34.2 C35.2 C36.1 C38.1 C43.1 C44.1 C45.1 D33.1 D34.1 D35.1 D36.1 D37.1 R61.2 R63.2 S10.5 U10.P$7 U11.3 U12.14
5V3: C46.2 C47.2 C48.2 C49.2 C50.2 C51.1 C53.1 C58.1 C59.1 C60.1 D49.1 D50.1 D51.1 D52.1 D53.1 R84.2 R86.2 S14.5 U14.P$7 U15.3 U16.14
5V4: C61.2 C62.2 C63.2 C64.2 C65.2 C66.1 C68.1 C73.1 C74.1 C75.1 D65.1 D66.1 D67.1 D68.1 D69.1 R107.2 R109.2 S18.5 U18.P$7 U19.3 U20.14
5V5: C76.2 C77.2 C78.2 C79.2 C80.2 C81.1 C83.1 C88.1 C89.1 C90.1 D81.1 D82.1 D83.1 D84.1 D85.1 R130.2 R132.2 S22.5 U22.P$7 U23.3 U24.14
GND: C1.1 C2.1 C3.1 C4.1 C5.1 C6.2 C8.2 C9.2 C10.2 C11.2 C12.- C13.2 C14.2 C15.2 C16.2 D1.3 D2.3 D3.3 D4.3 D5.3 D8.P$2 D10.P$2 D12.P$2 D13.P$2 D15.P$2 D17.P$2 D19.P$2 J2.P$1 J2.P$2 J4.P$1 J4.P$2 J5.1 LS1.- R4.1 R5.1 R21.1 R22.1 R23.1 U1.P$4 U1.P$6 U1.P$10 U1.P$15 U2.A1 U2.A2 U2.A3 U2.A4 U2.A5 U2.A6 U3.7
GND1: C7.1 C17.1 C18.1 C19.1 C20.1 C21.2 C22.2 C23.2 C24.- C25.2 C26.2 C27.2 C28.2 C29.2 C30.2 D14.3 D16.3 D18.3 D20.3 D21.3 D22.P$2 D23.P$2 D24.P$2 D25.P$2 D26.P$2 D27.P$2 D28.P$2 J32.P$1 J32.P$2 J34.P$1 J34.P$2 J36.1 LS2.- R41.1 R42.1 R44.1 R45.1 R46.1 U5.A1 U5.A2 U5.A3 U5.A4 U5.A5 U5.A6 U6.P$4 U6.P$6 U6.P$10 U6.P$15 U8.7
GND2: C31.1 C32.1 C33.1 C34.1 C35.1 C36.2 C37.2 C38.2 C39.- C40.2 C41.2 C42.2 C43.2 C44.2 C45.2 D33.3 D34.3 D35.3 D36.3 D37.3 D38.P$2 D39.P$2 D40.P$2 D41.P$2 D42.P$2 D43.P$2 D44.P$2 J50.P$1 J50.P$2 J52.P$1 J52.P$2 J54.1 LS3.- R64.1 R65.1 R67.1 R68.1 R69.1 U9.A1 U9.A2 U9.A3 U9.A4 U9.A5 U9.A6 U10.P$4 U10.P$6 U10.P$10 U10.P$15 U12.7
GND3: C46.1 C47.1 C48.1 C49.1 C50.1 C51.2 C52.2 C53.2 C54.- C55.2 C56.2 C57.2 C58.2 C59.2 C60.2 D49.3 D50.3 D51.3 D52.3 D53.3 D54.P$2 D55.P$2 D56.P$2 D57.P$2 D58.P$2 D59.P$2 D60.P$2 J68.P$1 J68.P$2 J70.P$1 J70.P$2 J72.1 LS4.- R87.1 R88.1 R90.1 R91.1 R92.1 U13.A1 U13.A2 U13.A3 U13.A4 U13.A5 U13.A6 U14.P$4 U14.P$6 U14.P$10 U14.P$15 U16.7
GND4: C61.1 C62.1 C63.1 C64.1 C65.1 C66.2 C67.2 C68.2 C69.- C70.2 C71.2 C72.2 C73.2 C74.2 C75.2 D65.3 D66.3 D67.3 D68.3 D69.3 D70.P$2 D71.P$2 D72.P$2 D73.P$2 D74.P$2 D75.P$2 D76.P$2 J86.P$1 J86.P$2 J88.P$1 J88.P$2 J90.1 LS5.- R110.1 R111.1 R113.1 R114.1 R115.1 U17.A1 U17.A2 U17.A3 U17.A4 U17.A5 U17.A6 U18.P$4 U18.P$6 U18.P$10 U18.P$15 U20.7
GND5: C76.1 C77.1 C78.1 C79.1 C80.1 C81.2 C82.2 C83.2 C84.- C85.2 C86.2 C87.2 C88.2 C89.2 C90.2 D81.3 D82.3 D83.3 D84.3 D85.3 D86.P$2 D87.P$2 D88.P$2 D89.P$2 D90.P$2 D91.P$2 D92.P$2 J104.P$1 J104.P$2 J106.P$1 J106.P$2 J108.1 LS6.- R133.1 R134.1 R136.1 R137.1 R138.1 U21.A1 U21.A2 U21.A3 U21.A4 U21.A5 U21.A6 U22.P$4 U22.P$6 U22.P$10 U22.P$15 U24.7
MBIN: F1.1 S4.1 U2.A9 U2.A10 U2.A11 U2.A12 U2.A13 U2.A14
MBIN1: F2.1 S8.1 U5.A9 U5.A10 U5.A11 U5.A12 U5.A13 U5.A14
MBIN2: F3.1 S12.1 U9.A9 U9.A10 U9.A11 U9.A12 U9.A13 U9.A14
MBIN3: F4.1 S16.1 U13.A9 U13.A10 U13.A11 U13.A12 U13.A13 U13.A14
MBIN4: F5.1 S20.1 U17.A9 U17.A10 U17.A11 U17.A12 U17.A13 U17.A14
MBIN5: F6.1 S24.1 U21.A9 U21.A10 U21.A11 U21.A12 U21.A13 U21.A14
N$1: LS2.+ S5.3
N$2: L1.P$1 U1.P$11
N$3: LS1.+ S3.3
N$4: D1.2 D2.4
N$5: D2.2 D3.4
N$6: D3.2 D4.4
N$7: D4.2 D5.4
N$8: L1.P$2 U1.P$9
N$9: D7.C R21.2
N$10: D14.2 D16.4
N$11: R3.1 R4.2 U1.P$5
N$12: C8.1 U1.P$3
N$13: R2.2 U1.P$1 U1.P$14
N$14: R1.1 U1.P$2
N$15: D16.2 D18.4
N$16: R5.2 R12.1 U4.1
N$17: D18.2 D20.4
N$18: D20.2 D21.4
N$19: L2.P$1 U6.P$11
N$20: D6.C S2.1
N$21: L2.P$2 U6.P$9
N$23: D9.C R22.2
N$24: D11.C R23.2
N$25: R39.2 U6.P$1 U6.P$14
N$26: C22.1 U6.P$3
N$27: R40.1 R41.2 U6.P$5
N$28: R38.1 U6.P$2
N$29: R42.2 R43.1 U7.1
N$31: D29.C S7.1
N$32: D30.C R44.2
N$33: D31.C R45.2
N$34: D32.C R46.2
N$35: LS3.+ S9.3
N$36: D33.2 D34.4
N$37: D34.2 D35.4
N$38: D35.2 D36.4
N$39: D36.2 D37.4
N$40: L3.P$1 U10.P$11
N$41: L3.P$2 U10.P$9
N$42: R62.2 U10.P$1 U10.P$14
N$43: C37.1 U10.P$3
N$44: R63.1 R64.2 U10.P$5
N$45: R61.1 U10.P$2
N$46: R65.2 R66.1 U11.1
N$48: D45.C S11.1
N$49: D46.C R67.2
N$50: D47.C R68.2
N$51: D48.C R69.2
N$52: LS4.+ S13.3
N$53: D49.2 D50.4
N$54: D50.2 D51.4
N$55: D51.2 D52.4
N$56: D52.2 D53.4
N$57: L4.P$1 U14.P$11
N$58: L4.P$2 U14.P$9
N$59: R85.2 U14.P$1 U14.P$14
N$60: C52.1 U14.P$3
N$61: R86.1 R87.2 U14.P$5
N$62: R84.1 U14.P$2
N$63: R88.2 R89.1 U15.1
N$65: D61.C S15.1
N$66: D62.C R90.2
N$67: D63.C R91.2
N$68: D64.C R92.2
N$69: LS5.+ S17.3
N$70: D65.2 D66.4
N$71: D66.2 D67.4
N$72: D67.2 D68.4
N$73: D68.2 D69.4
N$74: L5.P$1 U18.P$11
N$75: L5.P$2 U18.P$9
N$76: R108.2 U18.P$1 U18.P$14
N$77: C67.1 U18.P$3
N$78: R109.1 R110.2 U18.P$5
N$79: R107.1 U18.P$2
N$80: R111.2 R112.1 U19.1
N$82: D77.C S19.1
N$83: D78.C R113.2
N$84: D79.C R114.2
N$85: D80.C R115.2
N$86: LS6.+ S21.3
N$87: D81.2 D82.4
N$88: D82.2 D83.4
N$89: D83.2 D84.4
N$90: D84.2 D85.4
N$91: L6.P$1 U22.P$11
N$92: L6.P$2 U22.P$9
N$93: R131.2 U22.P$1 U22.P$14
N$94: C82.1 U22.P$3
N$95: R132.1 R133.2 U22.P$5
N$96: R130.1 U22.P$2
N$97: R134.2 R135.1 U23.1
N$99: D93.C S23.1
N$100: D94.C R136.2
N$101: D95.C R137.2
N$102: D96.C R138.2
P0: S3.2 U2.A36 U2.A37 U2.A38 U2.A39
P0+: J7.P$1 J7.P$2 R11.1
P0+1: J20.P$1 J20.P$2 R30.1
P0+2: J38.P$1 J38.P$2 R53.1
P0+3: J56.P$1 J56.P$2 R76.1
P0+4: J74.P$1 J74.P$2 R99.1
P0+5: J92.P$1 J92.P$2 R122.1
P1: R16.1 U2.A28 U2.A29 U2.A30 U2.A31
P1+: J8.P$1 J8.P$2 R15.1
P1+1: J21.P$1 J21.P$2 R32.1
P1+2: J39.P$1 J39.P$2 R55.1
P1+3: J57.P$1 J57.P$2 R78.1
P1+4: J75.P$1 J75.P$2 R101.1
P1+5: J93.P$1 J93.P$2 R124.1
P2: R18.1 U2.A19 U2.A20 U2.A21 U2.A22
P2+: J9.P$1 J9.P$2 R17.1
P2+1: J22.P$1 J22.P$2 R34.1
P2+2: J40.P$1 J40.P$2 R57.1
P2+3: J58.P$1 J58.P$2 R80.1
P2+4: J76.P$1 J76.P$2 R103.1
P2+5: J94.P$1 J94.P$2 R126.1
P3: R29.1 U5.A24
P4: R37.1 U5.A34
P5: R20.1 U2.A34
P5+: J10.P$1 J10.P$2 R19.1
P5+1: J23.P$1 J23.P$2 R36.1
P5+2: J41.P$1 J41.P$2 R59.1
P5+3: J59.P$1 J59.P$2 R82.1
P5+4: J77.P$1 J77.P$2 R105.1
P5+5: J95.P$1 J95.P$2 R128.1
P6: S5.2 U5.A36 U5.A37 U5.A38 U5.A39
P7: R33.1 U5.A28 U5.A29 U5.A30 U5.A31
P8: R8.1 U2.A27
P8+: J11.P$1 J11.P$2 R7.1
P8+1: J24.P$1 J24.P$2 R26.1
P8+2: J42.P$1 J42.P$2 R49.1
P8+3: J60.P$1 J60.P$2 R72.1
P8+4: J78.P$1 J78.P$2 R95.1
P8+5: J96.P$1 J96.P$2 R118.1
P9: R27.1 U5.A27
P10: D14.4 U8.13
P11: R10.1 U2.A24
P11+: J18.P$1 J18.P$2 R9.1
P11+1: J31.P$1 J31.P$2 R28.1
P11+2: J49.P$1 J49.P$2 R51.1
P11+3: J67.P$1 J67.P$2 R74.1
P11+4: J85.P$1 J85.P$2 R97.1
P11+5: J103.P$1 J103.P$2 R120.1
P12: D1.4 U3.13
P12LL: U2.A23 U3.2
P12LL1: U5.A23 U8.2
P12LL2: U9.A23 U12.2
P12LL3: U13.A23 U16.2
P12LL4: U17.A23 U20.2
P12LL5: U21.A23 U24.2
P13: J12.P$1 J12.P$2 U2.A18
P14: J13.P$1 J13.P$2 U2.A17
P15: J14.P$1 J14.P$2 U2.A16
P16: R6.1 U2.A15
P16+: J15.P$1 J15.P$2 R13.1
P16+1: J28.P$1 J28.P$2 R24.1
P16+2: J46.P$1 J46.P$2 R47.1
P16+3: J64.P$1 J64.P$2 R70.1
P16+4: J82.P$1 J82.P$2 R93.1
P16+5: J100.P$1 J100.P$2 R116.1
P17: R35.1 U5.A19 U5.A20 U5.A21 U5.A22
P18: J25.P$1 J25.P$2 U5.A18
P19: J16.P$1 J16.P$2 U2.A8
P20: J17.P$1 J17.P$2 U2.A7
P21: J26.P$1 J26.P$2 U5.A17
P22: J27.P$1 J27.P$2 U5.A16
P23: R25.1 U5.A15
P24: J29.P$1 J29.P$2 U5.A8
P25: J30.P$1 J30.P$2 U5.A7
P26: R52.1 U9.A24
P27: R60.1 U9.A34
P28: S9.2 U9.A36 U9.A37 U9.A38 U9.A39
P29: R56.1 U9.A28 U9.A29 U9.A30 U9.A31
P30: R50.1 U9.A27
P31: D33.4 U12.13
P32: R58.1 U9.A19 U9.A20 U9.A21 U9.A22
P33: J43.P$1 J43.P$2 U9.A18
P34: J44.P$1 J44.P$2 U9.A17
P35: J45.P$1 J45.P$2 U9.A16
P36: R48.1 U9.A15
P37: J47.P$1 J47.P$2 U9.A8
P38: J48.P$1 J48.P$2 U9.A7
P39: R75.1 U13.A24
P40: R83.1 U13.A34
P41: S13.2 U13.A36 U13.A37 U13.A38 U13.A39
P42: R79.1 U13.A28 U13.A29 U13.A30 U13.A31
P43: R73.1 U13.A27
P44: D49.4 U16.13
P45: R81.1 U13.A19 U13.A20 U13.A21 U13.A22
P46: J61.P$1 J61.P$2 U13.A18
P47: J62.P$1 J62.P$2 U13.A17
P48: J63.P$1 J63.P$2 U13.A16
P49: R71.1 U13.A15
P50: J65.P$1 J65.P$2 U13.A8
P51: J66.P$1 J66.P$2 U13.A7
P52: R98.1 U17.A24
P53: R106.1 U17.A34
P54: S17.2 U17.A36 U17.A37 U17.A38 U17.A39
P55: R102.1 U17.A28 U17.A29 U17.A30 U17.A31
P56: R96.1 U17.A27
P57: D65.4 U20.13
P58: R104.1 U17.A19 U17.A20 U17.A21 U17.A22
P59: J79.P$1 J79.P$2 U17.A18
P60: J80.P$1 J80.P$2 U17.A17
P61: J81.P$1 J81.P$2 U17.A16
P62: R94.1 U17.A15
P63: J83.P$1 J83.P$2 U17.A8
P64: J84.P$1 J84.P$2 U17.A7
P65: R121.1 U21.A24
P66: R129.1 U21.A34
P67: S21.2 U21.A36 U21.A37 U21.A38 U21.A39
P68: R125.1 U21.A28 U21.A29 U21.A30 U21.A31
P69: R119.1 U21.A27
P70: D81.4 U24.13
P71: R127.1 U21.A19 U21.A20 U21.A21 U21.A22
P72: J97.P$1 J97.P$2 U21.A18
P73: J98.P$1 J98.P$2 U21.A17
P74: J99.P$1 J99.P$2 U21.A16
P75: R117.1 U21.A15
P76: J101.P$1 J101.P$2 U21.A8
P77: J102.P$1 J102.P$2 U21.A7
PD: R14.1 S3.1
PD1: R31.1 S5.1
PD2: R54.1 S9.1
PD3: R77.1 S13.1
PD4: R100.1 S17.1
PD5: R123.1 S21.1
PP0: D12.P$1 R11.2 R14.2
PP1: D15.P$1 R15.2 R16.2
PP2: D17.P$1 R17.2 R18.2
PP3: D24.P$1 R28.2 R29.2
PP4: D25.P$1 R30.2 R31.2
PP5: D19.P$1 R19.2 R20.2
PP6: D26.P$1 R32.2 R33.2
PP7: D27.P$1 R34.2 R35.2
PP8: D8.P$1 R7.2 R8.2
PP9: D28.P$1 R36.2 R37.2
PP10: D23.P$1 R26.2 R27.2
PP11: D10.P$1 R9.2 R10.2
PP12: D22.P$1 R24.2 R25.2
PP13: D40.P$1 R51.2 R52.2
PP14: D41.P$1 R53.2 R54.2
PP15: D42.P$1 R55.2 R56.2
PP16: D13.P$1 R6.2 R13.2
PP17: D43.P$1 R57.2 R58.2
PP18: D44.P$1 R59.2 R60.2
PP19: D39.P$1 R49.2 R50.2
PP20: D38.P$1 R47.2 R48.2
PP21: D56.P$1 R74.2 R75.2
PP22: D57.P$1 R76.2 R77.2
PP23: D58.P$1 R78.2 R79.2
PP24: D59.P$1 R80.2 R81.2
PP25: D60.P$1 R82.2 R83.2
PP26: D55.P$1 R72.2 R73.2
PP27: D54.P$1 R70.2 R71.2
PP28: D72.P$1 R97.2 R98.2
PP29: D73.P$1 R99.2 R100.2
PP30: D74.P$1 R101.2 R102.2
PP31: D75.P$1 R103.2 R104.2
PP32: D76.P$1 R105.2 R106.2
PP33: D71.P$1 R95.2 R96.2
PP34: D70.P$1 R93.2 R94.2
PP35: D88.P$1 R120.2 R121.2
PP36: D89.P$1 R122.2 R123.2
PP37: D90.P$1 R124.2 R125.2
PP38: D91.P$1 R126.2 R127.2
PP39: D92.P$1 R128.2 R129.2
PP40: D87.P$1 R118.2 R119.2
PP41: D86.P$1 R116.2 R117.2
V_BATT: J5.2 S2.3
V_BATT1: J36.2 S7.3
V_BATT2: J54.2 S11.3
V_BATT3: J72.2 S15.3
V_BATT4: J90.2 S19.3
V_BATT5: J108.2 S23.3
VIN: C10.1 C13.1 C14.1 D7.A R2.1 S4.2 U1.P$12
VIN1: C25.1 C26.1 C27.1 D30.A R39.1 S8.2 U6.P$12
VIN2: C40.1 C41.1 C42.1 D46.A R62.1 S12.2 U10.P$12
VIN3: C55.1 C56.1 C57.1 D62.A R85.1 S16.2 U14.P$12
VIN4: C70.1 C71.1 C72.1 D78.A R108.1 S20.2 U18.P$12
VIN5: C85.1 C86.1 C87.1 D94.A R131.1 S24.2 U22.P$12
VIN_TAB: D6.A J3.P$1 J3.P$2
VIN_TAB1: D29.A J33.P$1 J33.P$2
VIN_TAB2: D45.A J51.P$1 J51.P$2
VIN_TAB3: D61.A J69.P$1 J69.P$2
VIN_TAB4: D77.A J87.P$1 J87.P$2
VIN_TAB5: D93.A J105.P$1 J105.P$2
VOUT3.1: D31.A J19.P$1 J19.P$2 S6.3
VOUT3.2: D47.A J37.P$1 J37.P$2 S10.3
VOUT3.3: D9.A J6.P$1 J6.P$2 S1.3
VOUT3.4: D63.A J55.P$1 J55.P$2 S14.3
VOUT3.5: D79.A J73.P$1 J73.P$2 S18.3
VOUT3.6: D95.A J91.P$1 J91.P$2 S22.3
VOUT5.0: D11.A J1.P$1 J1.P$2 S1.6
VOUT5.1: D32.A J35.P$1 J35.P$2 S6.6
VOUT5.2: D48.A J53.P$1 J53.P$2 S10.6
VOUT5.3: D64.A J71.P$1 J71.P$2 S14.6
VOUT5.4: D80.A J89.P$1 J89.P$2 S18.6
VOUT5.5: D96.A J107.P$1 J107.P$2 S22.6
VSUPPLY: S2.2 S4.3
VSUPPLY1: S7.2 S8.3
VSUPPLY2: S11.2 S12.3
VSUPPLY3: S15.2 S16.3
VSUPPLY4: S19.2 S20.3
VSUPPLY5: S23.2 S24.3

## Tracks (layer width: path | path; a pad name or v marks a point on that pad's centre or on a via)
3.3V
  Top 0.254: 95.12,57.66 92.9,57.66 90.68,59.88 35.43,59.88 34.48,58.93 34.48,51.63 33.84,50.99 33.84,44.58 | 33.84,44.58 33.84,42.05 35.74,40.16 35.74,38.33 U3.1 | U3.8 31.81,31.58 31.57,31.34 29.59,31.34 29.06,31.88 29.06,41.02 32.51,44.48 33.74,44.48 33.84,44.58
  Top 0.406: 97.34,60.83 U4.4 97.34,66.86 | 97.34,60.83 97.34,59.56 99.25,57.66 S1.2 | 97.34,60.83 96.71,60.83 95.12,59.24 95.12,57.66 95.12,50.67 91.75,47.3 90.15,47.3 F1.2 | C12.+ 97.34,72.71 U4.2 97.34,66.86 | 97.34,66.86 101.37,66.86 R12.2
  pour Top (isolate 0.305): 96.39,73.85 96.39,67.5 92.27,67.5 92.27,61.47 102.43,61.47 102.43,67.5 98.3,67.5 98.3,73.85
3.3V1
  Top 0.254: 209.99,57.66 207.77,57.66 205.55,59.88 150.3,59.88 149.35,58.93 149.35,51.63 148.72,50.99 148.72,44.58 | 148.72,44.58 148.72,42.05 150.61,40.16 150.61,38.33 U8.1 | U8.8 146.68,31.58 146.44,31.34 144.46,31.34 143.93,31.88 143.93,41.02 147.38,44.48 148.62,44.48 148.72,44.58
  Top 0.406: 212.22,60.83 U7.4 212.22,66.86 | 212.22,60.83 212.22,59.56 214.12,57.66 S6.2 | 212.22,60.83 211.58,60.83 209.99,59.24 209.99,57.66 209.99,50.67 206.62,47.3 205.02,47.3 F2.2 | C24.+ 212.22,72.71 U7.2 212.22,66.86 | 212.22,66.86 216.24,66.86 R43.2
  pour Top (isolate 0.305): 211.26,73.85 211.26,67.5 207.14,67.5 207.14,61.47 217.3,61.47 217.3,67.5 213.17,67.5 213.17,73.85
3.3V2
  Top 0.254: 324.87,57.66 322.64,57.66 320.42,59.88 265.18,59.88 264.22,58.93 264.22,51.63 263.59,50.99 263.59,44.58 | 263.59,44.58 263.59,42.05 265.48,40.16 265.48,38.33 U12.1 | U12.8 261.55,31.58 261.31,31.34 259.33,31.34 258.8,31.88 258.8,41.02 262.25,44.48 263.49,44.48 263.59,44.58
  Top 0.406: 327.09,60.83 U11.4 327.09,66.86 | 327.09,60.83 327.09,59.56 328.99,57.66 S10.2 | 327.09,60.83 326.45,60.83 324.87,59.24 324.87,57.66 324.87,50.67 321.49,47.3 319.89,47.3 F3.2 | C39.+ 327.09,72.71 U11.2 327.09,66.86 | 327.09,66.86 331.11,66.86 R66.2
  pour Top (isolate 0.305): 326.14,73.85 326.14,67.5 322.01,67.5 322.01,61.47 332.17,61.47 332.17,67.5 328.04,67.5 328.04,73.85
3.3V3
  Top 0.254: 95.12,128.56 92.9,128.56 90.68,130.78 35.43,130.78 34.48,129.83 34.48,122.52 33.84,121.89 33.84,115.47 | 33.84,115.47 33.84,112.95 35.74,111.06 35.74,109.23 U16.1 | U16.8 31.81,102.48 31.57,102.24 29.59,102.24 29.06,102.78 29.06,111.92 32.51,115.37 33.74,115.37 33.84,115.47
  Top 0.406: 97.34,131.73 U15.4 97.34,137.76 | 97.34,131.73 97.34,130.46 99.25,128.56 S14.2 | 97.34,131.73 96.71,131.73 95.12,130.14 95.12,128.56 95.12,121.57 91.75,118.19 90.15,118.19 F4.2 | C54.+ 97.34,143.61 U15.2 97.34,137.76 | 97.34,137.76 101.37,137.76 R89.2
  pour Top (isolate 0.305): 96.39,144.75 96.39,138.4 92.27,138.4 92.27,132.37 102.43,132.37 102.43,138.4 98.3,138.4 98.3,144.75
3.3V4
  Top 0.254: 209.99,128.56 207.77,128.56 205.55,130.78 150.3,130.78 149.35,129.83 149.35,122.52 148.72,121.89 148.72,115.47 | 148.72,115.47 148.72,112.95 150.61,111.06 150.61,109.23 U20.1 | U20.8 146.68,102.48 146.44,102.24 144.46,102.24 143.93,102.78 143.93,111.92 147.38,115.37 148.62,115.37 148.72,115.47
  Top 0.406: 212.22,131.73 U19.4 212.22,137.76 | 212.22,131.73 212.22,130.46 214.12,128.56 S18.2 | 212.22,131.73 211.58,131.73 209.99,130.14 209.99,128.56 209.99,121.57 206.62,118.19 205.02,118.19 F5.2 | C69.+ 212.22,143.61 U19.2 212.22,137.76 | 212.22,137.76 216.24,137.76 R112.2
  pour Top (isolate 0.305): 211.26,144.75 211.26,138.4 207.14,138.4 207.14,132.37 217.3,132.37 217.3,138.4 213.17,138.4 213.17,144.75
3.3V5
  Top 0.254: 324.87,128.56 322.64,128.56 320.42,130.78 265.18,130.78 264.22,129.83 264.22,122.52 263.59,121.89 263.59,115.47 | 263.59,115.47 263.59,112.95 265.48,111.06 265.48,109.23 U24.1 | U24.8 261.55,102.48 261.31,102.24 259.33,102.24 258.8,102.78 258.8,111.92 262.25,115.37 263.49,115.37 263.59,115.47
  Top 0.406: 327.09,131.73 U23.4 327.09,137.76 | 327.09,131.73 327.09,130.46 328.99,128.56 S22.2 | 327.09,131.73 326.45,131.73 324.87,130.14 324.87,128.56 324.87,121.57 321.49,118.19 319.89,118.19 F6.2 | C84.+ 327.09,143.61 U23.2 327.09,137.76 | 327.09,137.76 331.11,137.76 R135.2
  pour Top (isolate 0.305): 326.14,144.75 326.14,138.4 322.01,138.4 322.01,132.37 332.17,132.37 332.17,138.4 328.04,138.4 328.04,144.75
5V  (via drill 0.38, 0.51)
  Top 0.254: U3.14 35.71,30.89 36.22,30.38 40.23,30.38 40.26,30.35
  Top 0.406: C11.1 95.03,72.61 U4.3 95.12,69.88 v95.12,67.5 | 57.66,30.35 64.96,30.35 | 64.96,30.35 66.55,30.35 | 66.55,30.35 73.85,30.35 | 73.85,30.35 75.44,30.35 | 75.44,30.35 82.74,30.35 | 82.74,30.35 84.33,30.35 | 84.33,30.35 90.68,30.35 v91.31,30.99 | D1.1 48.81,32.04 48.82,32.04 48.82,30.35 | D2.1 57.7,30.39 57.66,30.35 | 64.96,30.35 64.84,30.48 C3.2 | D3.1 66.59,30.39 66.55,30.35 | C4.2 73.75,30.45 73.85,30.35 | D4.1 75.48,30.39 75.44,30.35 | C5.2 82.64,30.45 82.74,30.35 | D5.1 84.37,30.39 84.33,30.35 | C9.1 C16.1 C15.1 99.52,40.57 C6.1 99.57,40.62 99.57,41.78 99.25,42.1 S1.5 v99.25,52.55 v99.24,52.56 | U1.P$7 98.45,38.78 v98.93,38.29 | 57.66,30.35 55.96,30.35 | 55.96,30.35 48.82,30.35 | 48.82,30.35 46.99,30.35 | 46.99,30.35 40.26,30.35 39.56,30.35 | C1.2 46.93,30.41 46.99,30.35 | C2.2 56,30.39 55.96,30.35
  Bottom 0.406: v91.31,30.99 99.89,30.99 103.38,34.48 v103.38,37.34 | v95.12,67.5 95.12,55.75 96.39,54.48 98.55,54.48 99.24,53.79 v99.24,52.57 v99.24,52.56
  other vias: 102.43,38.29 101.31,38.29 100.07,38.35 103.38,38.29 98.95,37.44
  pour Top (isolate 0.305, no thermals): 96.08,39.24 98.62,39.24 98.62,41.15 105.12,41.15 105.12,35.59 97.98,35.59 97.98,38.45 96.08,38.45
  pour Bottom: 97.98,35.59 97.98,38.45 96.08,38.45 96.08,39.24 98.62,39.24 98.62,41.15 105.12,41.15 105.12,35.59
5V1  (via drill 0.38, 0.51)
  Top 0.254: U8.14 150.58,30.89 151.09,30.38 155.1,30.38 155.13,30.35
  Top 0.406: C23.1 209.91,72.61 U7.3 209.99,69.88 v209.99,67.5 | 172.53,30.35 179.83,30.35 | 179.83,30.35 181.42,30.35 | 181.42,30.35 188.72,30.35 | 188.72,30.35 190.31,30.35 | 190.31,30.35 197.61,30.35 | 197.61,30.35 199.2,30.35 | 199.2,30.35 205.55,30.35 v206.18,30.99 | D14.1 163.68,32.04 163.69,32.04 163.69,30.35 | D16.1 172.57,30.39 172.53,30.35 | 179.83,30.35 179.71,30.48 C18.2 | D18.1 181.46,30.39 181.42,30.35 | C19.2 188.62,30.45 188.72,30.35 | D20.1 190.35,30.39 190.31,30.35 | C20.2 197.51,30.45 197.61,30.35 | D21.1 199.24,30.39 199.2,30.35 | C28.1 C30.1 C29.1 214.39,40.57 C21.1 214.44,40.62 214.44,41.78 214.12,42.1 S6.5 214.12,52.55 v214.11,52.56 | U6.P$7 213.32,38.78 v213.8,38.29 | 172.53,30.35 170.83,30.35 | 170.83,30.35 163.69,30.35 | 163.69,30.35 161.86,30.35 | 161.86,30.35 155.13,30.35 154.43,30.35 | C7.2 161.8,30.41 161.86,30.35 | C17.2 170.87,30.39 170.83,30.35
  Bottom 0.406: v206.18,30.99 214.76,30.99 218.25,34.48 v218.25,37.34 | v209.99,67.5 209.99,55.75 211.26,54.48 213.42,54.48 214.11,53.79 v214.11,52.57 v214.11,52.56
  other vias: 217.3,38.29 216.19,38.29 214.94,38.35 218.25,38.29 213.82,37.44
  pour Top (isolate 0.305, no thermals): 210.95,39.24 213.49,39.24 213.49,41.15 220,41.15 220,35.59 212.85,35.59 212.85,38.45 210.95,38.45
  pour Bottom: 212.85,35.59 212.85,38.45 210.95,38.45 210.95,39.24 213.49,39.24 213.49,41.15 220,41.15 220,35.59
5V2  (via drill 0.38, 0.51)
  Top 0.254: U12.14 265.45,30.89 265.96,30.38 269.98,30.38 270,30.35
  Top 0.406: C38.1 324.78,72.61 U11.3 324.87,69.88 v324.87,67.5 | 287.4,30.35 294.7,30.35 | 294.7,30.35 296.29,30.35 | 296.29,30.35 303.59,30.35 | 303.59,30.35 305.18,30.35 | 305.18,30.35 312.48,30.35 | 312.48,30.35 314.07,30.35 | 314.07,30.35 320.42,30.35 v321.06,30.99 | D33.1 278.55,32.04 278.56,32.04 278.56,30.35 | D34.1 287.44,30.39 287.4,30.35 | 294.7,30.35 294.58,30.48 C33.2 | D35.1 296.33,30.39 296.29,30.35 | C34.2 303.5,30.45 303.59,30.35 | D36.1 305.22,30.39 305.18,30.35 | C35.2 312.39,30.45 312.48,30.35 | D37.1 314.11,30.39 314.07,30.35 | C43.1 C45.1 C44.1 329.26,40.57 C36.1 329.31,40.62 329.31,41.78 328.99,42.1 S10.5 328.99,52.55 v328.98,52.56 | U10.P$7 328.19,38.78 v328.68,38.29 | 287.4,30.35 285.7,30.35 | 285.7,30.35 278.56,30.35 | 278.56,30.35 276.73,30.35 | 276.73,30.35 270,30.35 269.3,30.35 | C31.2 276.67,30.41 276.73,30.35 | C32.2 285.74,30.39 285.7,30.35
  Bottom 0.406: v321.06,30.99 329.63,30.99 333.12,34.48 v333.12,37.34 | v324.87,67.5 324.87,55.75 326.14,54.48 328.29,54.48 328.98,53.79 v328.98,52.57 v328.98,52.56
  other vias: 332.17,38.29 331.06,38.29 329.81,38.35 333.12,38.29 328.69,37.44
  pour Top (isolate 0.305, no thermals): 325.82,39.24 328.36,39.24 328.36,41.15 334.87,41.15 334.87,35.59 327.72,35.59 327.72,38.45 325.82,38.45
  pour Bottom: 327.72,35.59 327.72,38.45 325.82,38.45 325.82,39.24 328.36,39.24 328.36,41.15 334.87,41.15 334.87,35.59
5V3  (via drill 0.38, 0.51)
  Top 0.254: U16.14 35.71,101.79 36.22,101.28 40.23,101.28 40.26,101.25